# Altium PCB usbtottl.PcbDoc
Units mm, origin at the board's own origin, x right, y up, seen from the top; angles counter-clockwise.
Board outline 152.4 x 101.6 mm, 2 copper layers (Top Layer, Bottom Layer); 10 components, 9 nets, 41 pads, 0 vias.
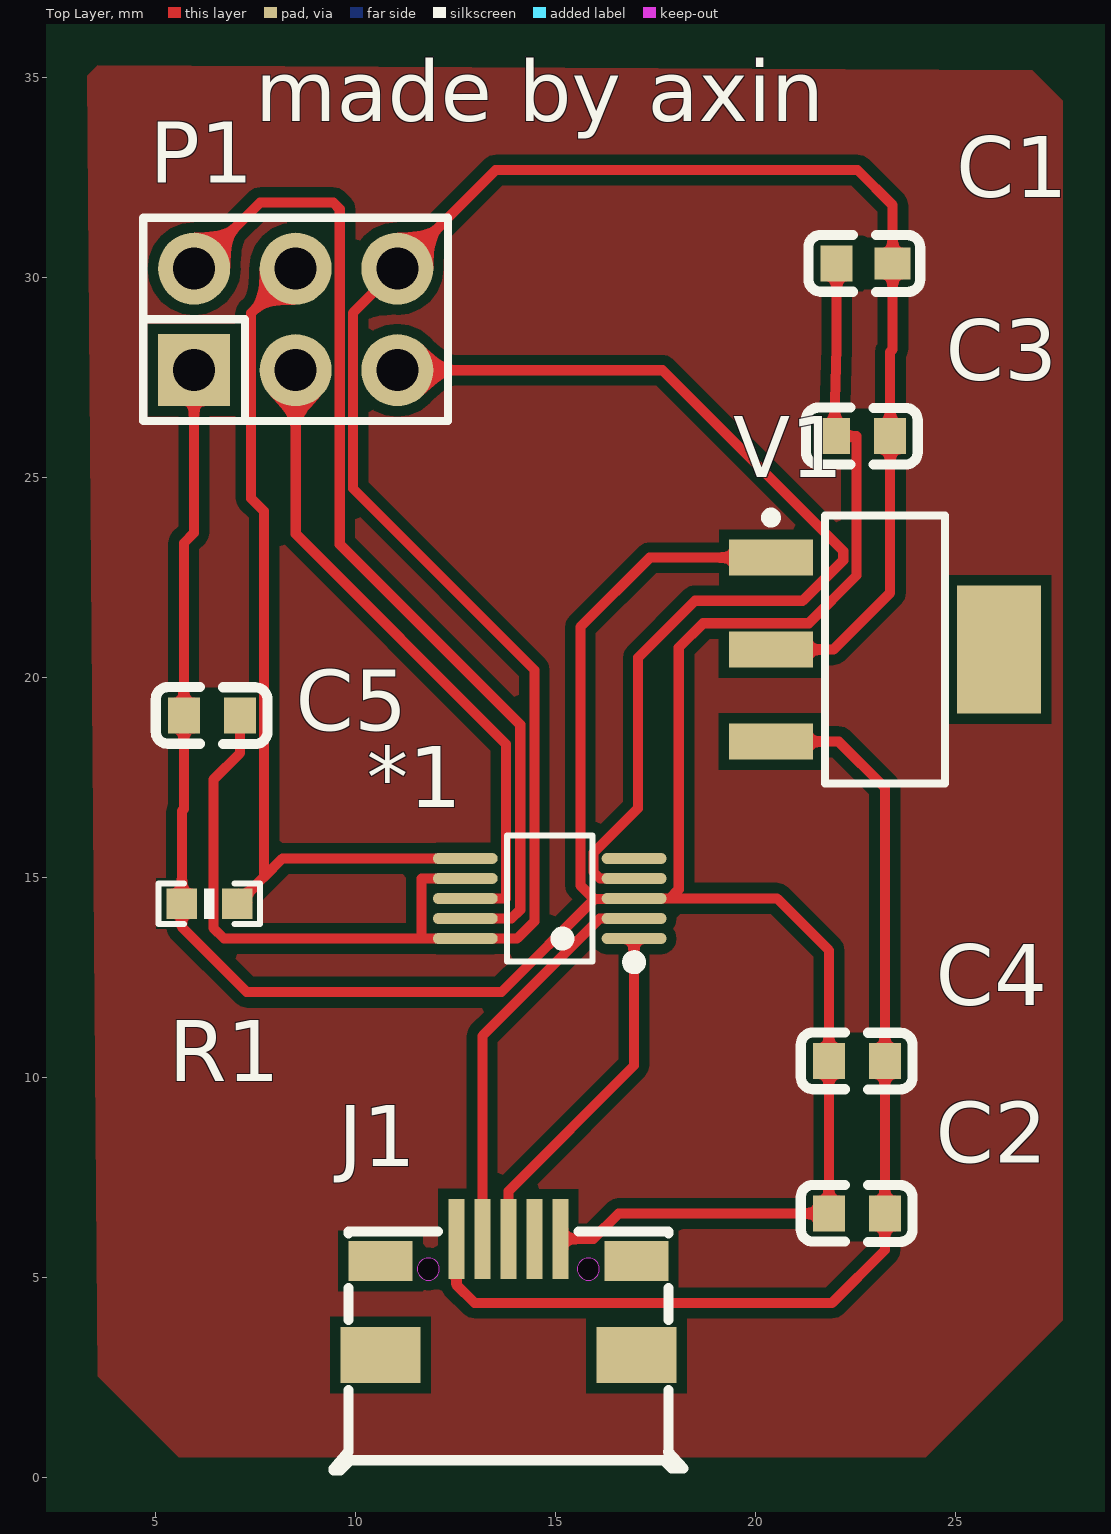
[diagram p0: Top Layer view]
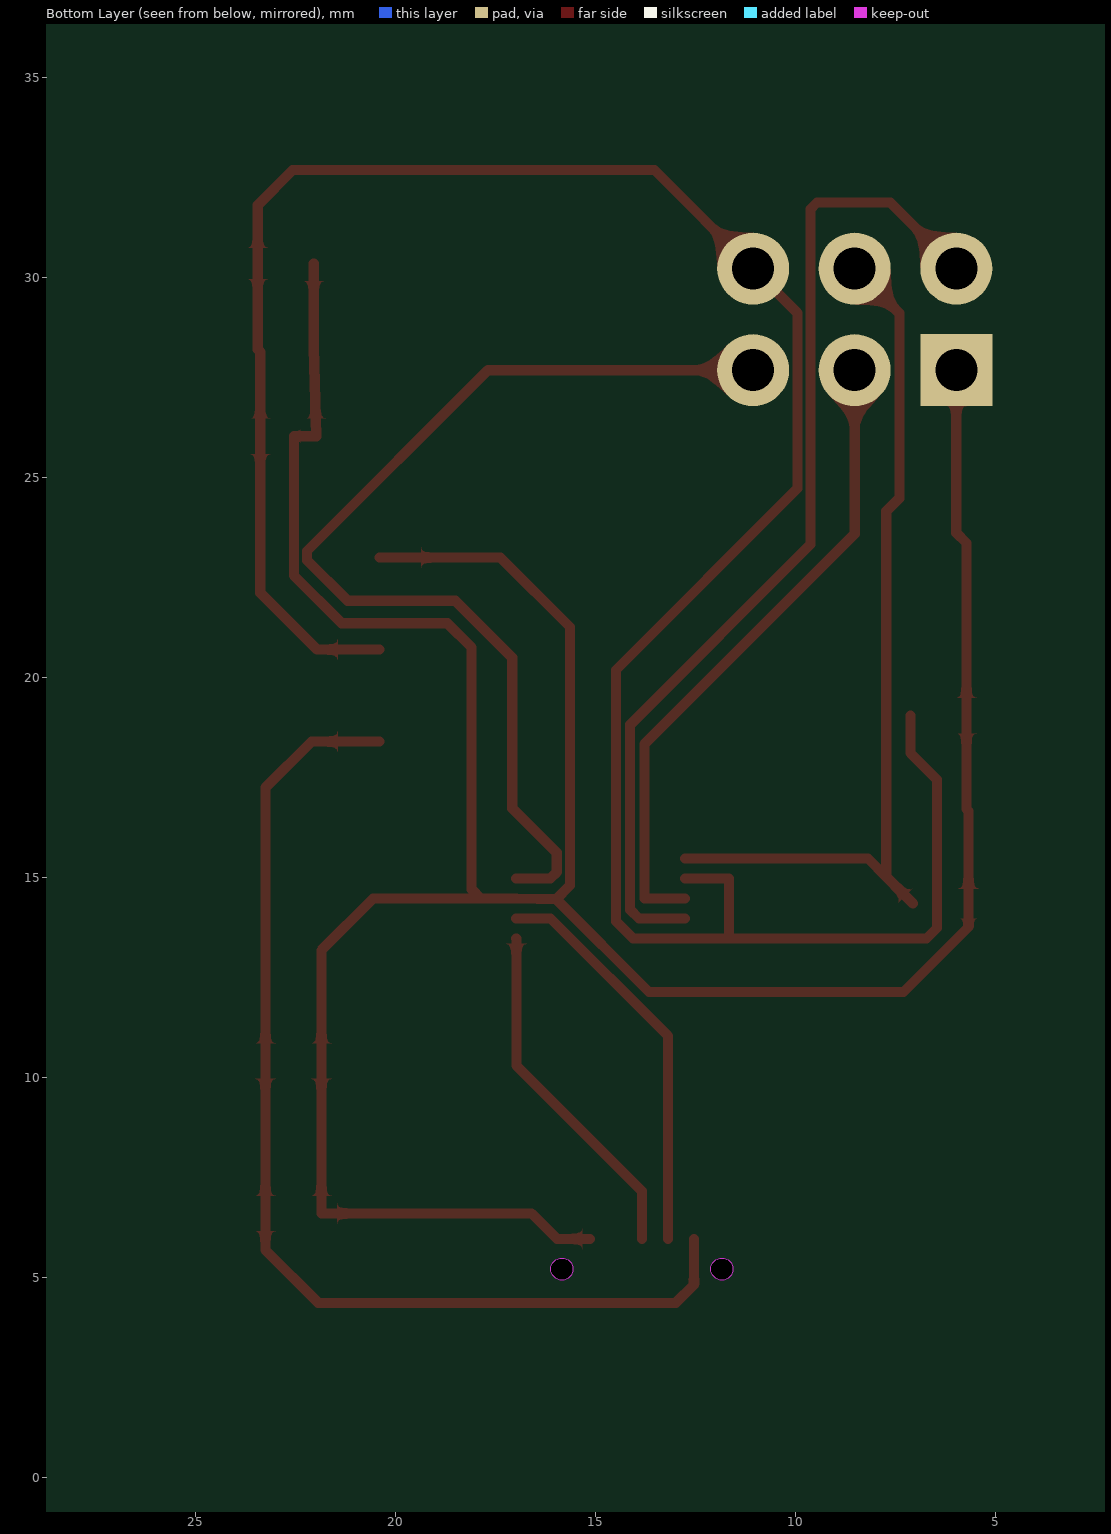
[diagram p1: Bottom Layer view, seen from below]

## Layer stack, top to bottom
Top Solder: solder mask 0.0102, Solder Resist, Dk 3.5
Top Layer: signal copper 0.0356
Dielectric 1: dielectric 0.32, FR-4, Dk 4.8
Bottom Layer: signal copper 0.0356
Bottom Solder: solder mask 0.0102, Solder Resist, Dk 3.5

## Board outline
-73.787,-32.131 78.613,-32.131 78.613,69.469 -73.787,69.469

## Design rules (kind name [scope] priority, off if disabled: settings)
Clearance [All] p1: gap=0.076 ignorepadtopadclearanceinfootprint=FALSE
MinimumSolderMaskSliver [All] p1: minsoldermaskwidth=0.127
PolygonConnect [All] p1: connectstyle=Relief reliefconductorwidth=0.254 reliefentries=4 polygonreliefangle="90 Angle" airgapwidth=0.254
RoutingVias [All] p1: holewidth=0.711 width=1.27 viastyle="Through Hole" minholewidth=0.711 minwidth=1.27 maxholewidth=0.711 maxwidth=1.27
SilkToSilkClearance [All] p1: silktosilkclearance=0.127
SilkToSolderMaskClearance [IsPad] p1: minsilkscreentomaskgap=0.025 clearancetoexposedcopper=TRUE
SolderMaskExpansion [All] p1: expansion=0.102
Width [All] p1: maxlimit=0.254 minlimit=0.254 preferedwidth=0.254
27 further rules are at their usual default settings.

## Classes and differential pairs
component class usbttl: *1 C1 C2 C3 C5 J1 P1 R1 V1

## Components (designator, comment, footprint, x,y, rotation, side; value= is the part's Value field where it differs from the comment)
*1 "ch340x" MSOP-10_L3.0-W3.0-P0.50-LS5.0-BL 14.859,14.478 r90 top
C1 "10uF" C0603#1 22.733,30.353 r0 top
C2 "100nF" C0603#2 22.541,6.604 r0 top
C3 "100nF" C0603#2 22.671,26.035 r0 top
C4 "10uF" C0603#2 22.541,10.414 r0 top
C5 "100nF" C0603#2 6.415,19.05 r0 top
J1 "Micro_USB" MICRO-USB-SMD_MICROQTJ 13.828,4.517 r0 top
P1 "Header 6" HDR-TH_6P-P2.54-V-M-R2-C3-S2.54-1 8.509,28.956 r0 top
R1 "4.7K" 0603P 6.35,14.351 r0 top
V1 "AMS1117-3V3" SOT223_L 23.241,20.701 r0 top

## Footprints (in the part's own frame and the unit in brackets; to place one, negate y for a bottom-side part, rotate by r counter-clockwise, add the part's x,y. Pads: shape width x height; smd on the part's side, far side on the other; paste and mask are expansions set on the pad)
0603P [mil]
  rect 30x30 smd: 1(-27,0) 2(27.5,-0.06)
  silkscreen extent -50,-20 50,20
C0603#1 [mm]
  rect 0.8x0.9 smd mask+0.051: 1(-0.7,0)
  rect 0.9x0.8 smd mask+0.051: 2(0.7,0)
  silkscreen extent -1.41,-0.71 1.39,0.72
C0603#2 [mm]
  rect 0.8x0.9 smd mask+0.051: 1(-0.7,0) 2(0.7,0)
  silkscreen extent -1.41,-0.71 1.39,0.72
HDR-TH_6P-P2.54-V-M-R2-C3-S2.54-1 [mm]
  rect 1.8x1.8 hole 1.05 mask+0.051: 1(-2.54,-1.27)
  round 1.8 hole 1.05 mask+0.051: 2(-2.54,1.27) 3(0,-1.27) 4(0,1.27) 5(2.54,-1.27) 6(2.54,1.27)
  silkscreen extent -3.81,-2.54 3.81,2.54
MICRO-USB-SMD_MICROQTJ [mm]
  rect 0.4x2 smd mask+0.051: 1(-1.3,1.452) 2(-0.65,1.452) 3(0,1.452) 4(0.65,1.452) 5(1.3,1.452)
  rect 1.6x1 smd mask+0.051: 6(-3.2,0.902) 9(3.2,0.902)
  rect 2x1.4 smd mask+0.051: 7(-3.2,-1.452) 8(3.2,-1.452)
  Keep-Out Layer board cut-out: 2.275,0.698 2.275,0.753 2.233,0.854 2.156,0.931 2.054,0.973 1.945,0.973 1.844,0.931 1.767,0.854 1.725,0.753 1.725,0.698 1.725,0.643 1.767,0.542 1.844,0.465 1.945,0.423 2.054,0.423 2.156,0.465 2.233,0.542 2.275,0.643 2.275,0.698 2.275,0.698
  Keep-Out Layer board cut-out: -1.725,0.698 -1.725,0.753 -1.767,0.854 -1.844,0.931 -1.946,0.973 -2.055,0.973 -2.156,0.931 -2.233,0.854 -2.275,0.753 -2.275,0.698 -2.275,0.643 -2.233,0.542 -2.156,0.465 -2.055,0.423 -1.946,0.423 -1.844,0.465 -1.767,0.542 -1.725,0.643 -1.725,0.698 -1.725,0.698
  silkscreen extent -4.37,-4.34 4.38,1.63
MSOP-10_L3.0-W3.0-P0.50-LS5.0-BL [mm]
  oval 0.28x1.62 smd mask+0.051: 1(-1,-2.11) 2(-0.5,-2.11) 3(0,-2.11) 4(0.5,-2.11) 5(1,-2.11) 6(1,2.11) 7(0.5,2.11) 8(0,2.11) 9(-0.5,2.11) 10(-1,2.11)
  silkscreen extent -1.74,-2.26 1.58,1.07
SOT223_L [mm] "SOT223, 4-Leads, Body 6.5x3.5mm, Pitch 2.3mm, Lead Span 7mm, IPC High Density"
  rect 2.1x0.9 smd: 1(-2.85,2.3) 2(-2.85,0) 3(-2.85,-2.3)
  rect 2.1x3.2 smd: 4(2.85,0)
  silkscreen extent -2.97,-3.35 1.5,3.42, body extent -1.85,-3.35 1.85,3.35, height 1.7

## Part data
C1 C2 C3 C4 C5: library part Cap, "Capacitor", LatestRevisionDate=17-Jul-2002, LatestRevisionNote="Re-released for DXP Platform.", PackageDescription="Radial Cap, Thru-Hole; 2 Leads; 0.3 in Pin Spacing", PackageReference=RAD-0.3, Published=8-Jun-2000, Publisher="Altium Limited"
P1: "Header, 6-Pin", LatestRevisionDate=17-Jul-2002, LatestRevisionNote="Re-released for DXP Platform.", Publisher="Altium Limited"
R1: library part R
V1: library part AMS1117, "三端稳压芯片", BOM名称=ÎÈÑ, 学习资源=www.ooocke.

## Nets (pads, with @x,y where several pads share a name; then routed paths per layer and width w, separated by ;. In a path a pad name is that pad's centre, name@x,y a point inside that pad or via, vN(x,y) a via of type N, cw(c..) or ccw(c..) an arc to the next point about the centre after c; other vN are vias at no path point)
3V3: *1.7 *1.10 C1.2 C3.2 C5.2 P1.6 V1.2 | length 62.2
  Top Layer w0.254: C5.2 7.115,18.113 6.452,17.45 6.452,13.741 6.715,13.478 11.652,13.478 ; *1.7 11.652,14.978 11.652,13.478 ; V1.2 21.949,20.701 23.371,22.123 C3.2 23.371,28.143 23.433,28.205 C1.2 23.433,31.812 22.555,32.69 13.513,32.69 P1.6 9.942,29.119 9.942,24.729 14.478,20.193 14.478,13.91 14.046,13.478 *1.10 11.652,13.478
+5: C2.2 C4.2 J1.1 V1.3 | length 27.5
  Top Layer w0.254: J1.1 12.527,4.821 12.979,4.369 21.92,4.369 23.241,5.69 C2.2 C4.2 23.241,17.247 22.087,18.401 V1.3
Boot0: *1.6 P1.4 R1.2 | length 22
  Top Layer w0.254: R1.2 7.718,15.019 7.718,24.159 7.391,24.486 7.391,29.108 P1.4 ; 7.722,15.022 8.177,15.478 *1.6
D+: *1.1 J1.3 | length 8.8
  Top Layer w0.254: J1.3 13.828,7.163 16.967,10.302 16.967,13.478 *1.1
D-: *1.2 J1.2 | length 10.1
  Top Layer w0.254: J1.2 13.178,11.044 16.112,13.978 *1.2
GND: *1.3 C1.1 C2.1 C3.1 C4.1 C5.1 J1.5 P1.1 R1.1 V1.1 | length 78.3
  Top Layer w0.254: P1.1 5.969,23.622 5.715,23.368 C5.1 5.715,16.713 5.664,16.662 R1.1 5.664,13.764 7.287,12.141 13.653,12.141 15.973,14.461 ; J1.5 15.951,5.969 16.586,6.604 C2.1 C4.1 21.841,13.183 20.546,14.478 17.856,14.478 ; V1.1 17.362,23.001 15.626,21.264 15.626,14.808 15.973,14.461 ; C1.1 22.033,28.256 C3.1 22.53,26.035 22.53,22.555 21.336,21.361 18.694,21.361 18.085,20.752 18.085,14.707 17.856,14.478 ; 15.973,14.461 *1.3 17.856,14.478
NRST: *1.4 P1.5 | length 26.3
  Top Layer w0.254: P1.5 17.678,27.686 22.2,23.165 22.2,22.936 21.184,21.92 18.491,21.92 17.069,20.498 17.069,16.734 15.956,15.621 15.956,15.138 16.116,14.978 *1.4
RX: *1.8 P1.3 | length 16.4
  Top Layer w0.254: P1.3 8.509,23.597 13.767,18.339 13.767,14.478 *1.8
TX: *1.9 P1.2 | length 25.2
  Top Layer w0.254: P1.2 7.62,31.877 9.449,31.877 9.612,31.714 9.612,23.332 14.122,18.821 14.122,14.199 13.902,13.978 *1.9
pads on no net: *1.5 J1.4 J1.6 J1.7 J1.8 J1.9 V1.4

## Polygon pours and split planes (outlines as drawn)
no net on Top Layer "Top Layer-No Net" (solid, pour order 0): 3.302,35.052 3.556,2.54 5.588,0.508 24.257,0.508 27.686,3.937 27.686,34.417 26.924,35.179 3.556,35.306

## Silkscreen, mask and mechanical layers (free items; w line width, h text height)
Top Overlay:
  text "made by axin" at 7.493,33.909 h1.52
Mechanical 1:
  lines w0.254: 2.921,34.798 2.921,35.179 3.429,35.687 27.305,35.687 28.194,34.798 28.194,3.556 24.638,0 5.207,0 2.921,2.286 2.921,34.925
Drill Drawing:
  lines w0.254: 3.302,2.286 3.302,34.976 3.734,35.408 26.695,35.408 27.254,35.408 28.016,34.646 28.016,3.708 24.587,0.279 5.309,0.279 3.302,2.286